# Altium PCB PCB_Mobile-robot.pcbdoc
Units mm, origin at the board's own origin, x right, y up, seen from the top; angles counter-clockwise.
Board outline 125.65 x 110.65 mm, 2 copper layers (Top Layer, Bottom Layer); 24 components, 75 nets, 140 pads, 0 vias.
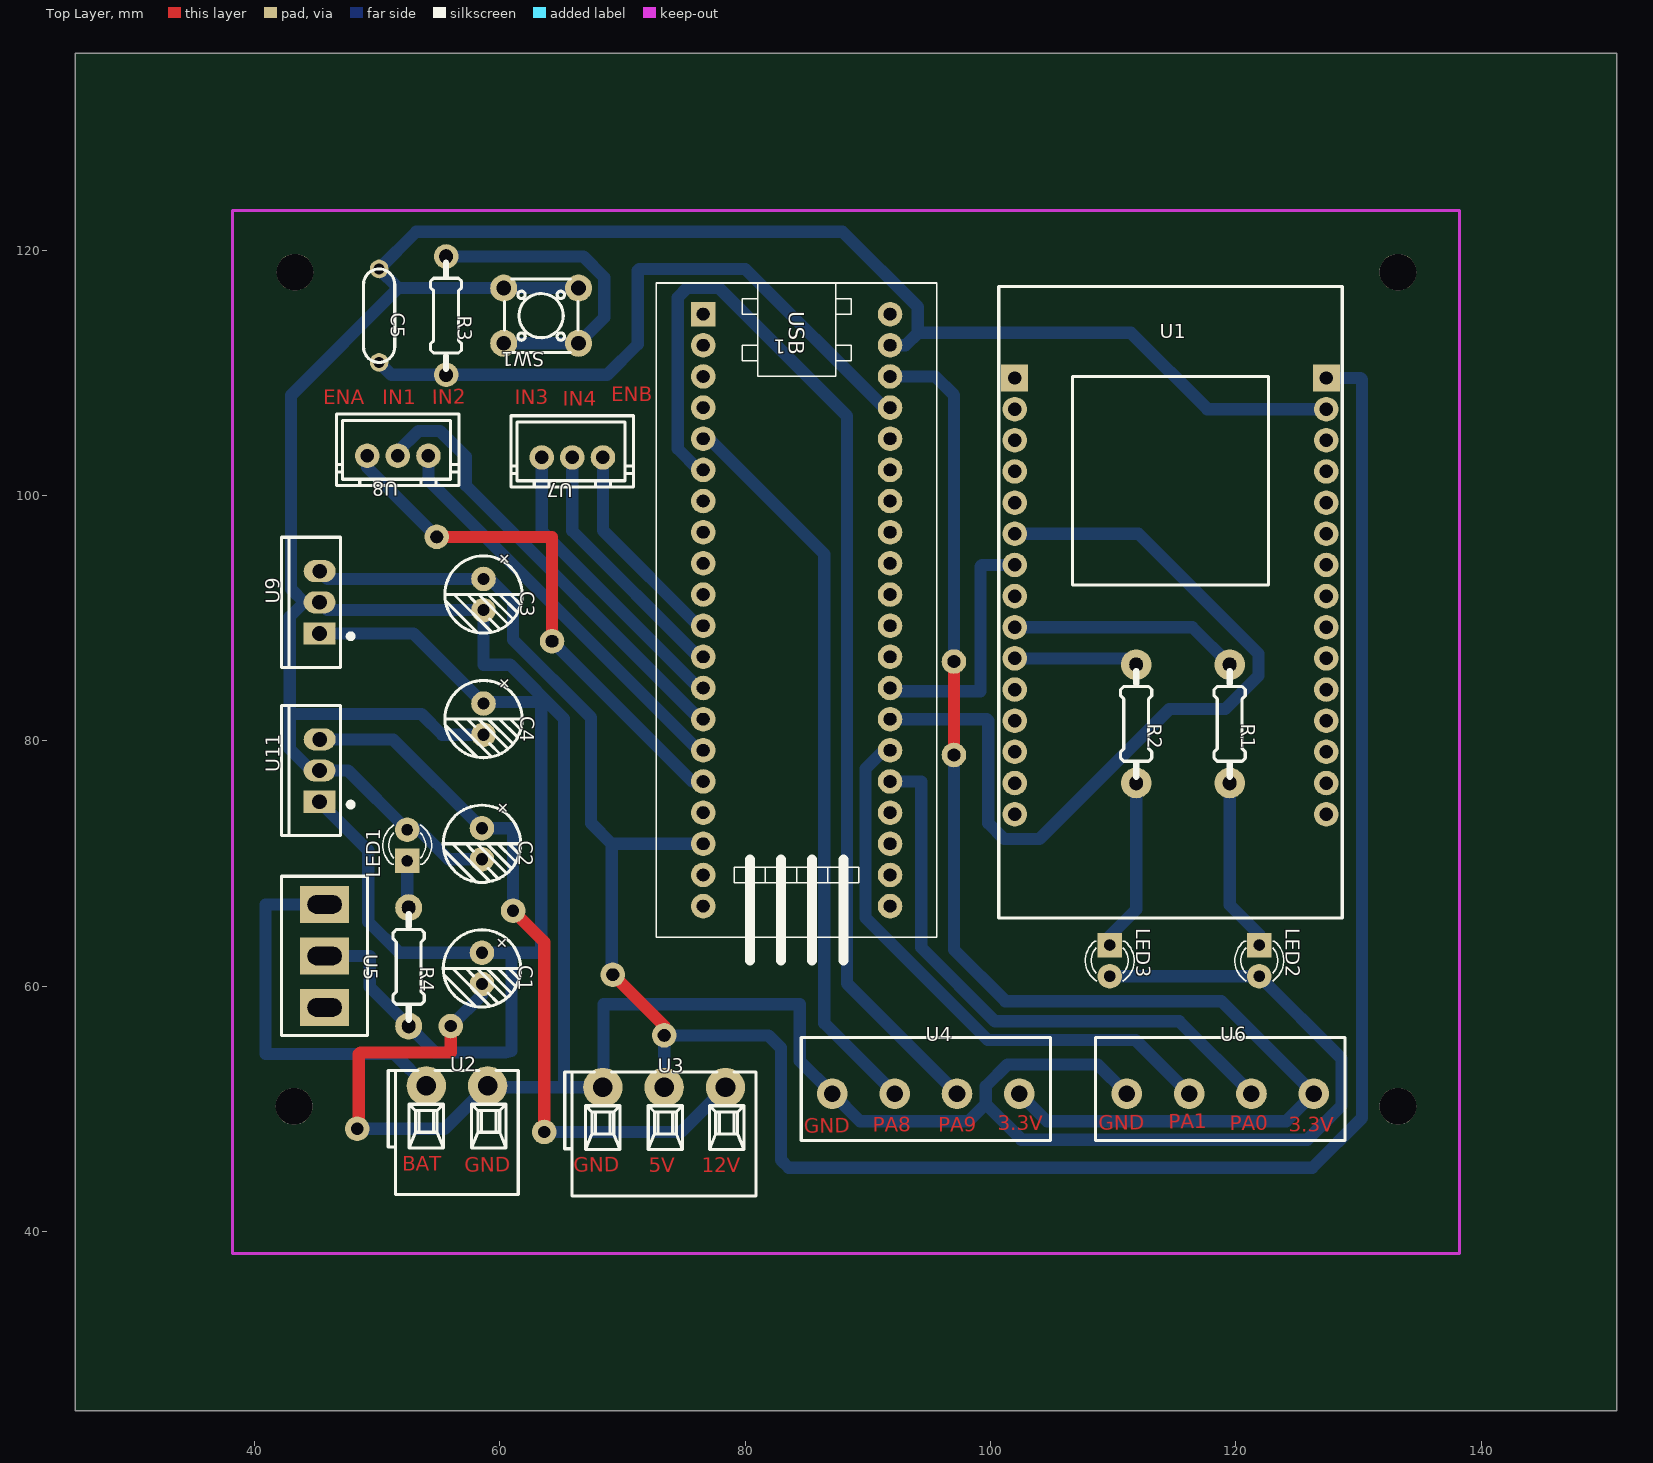
[diagram p0: Top Layer view]
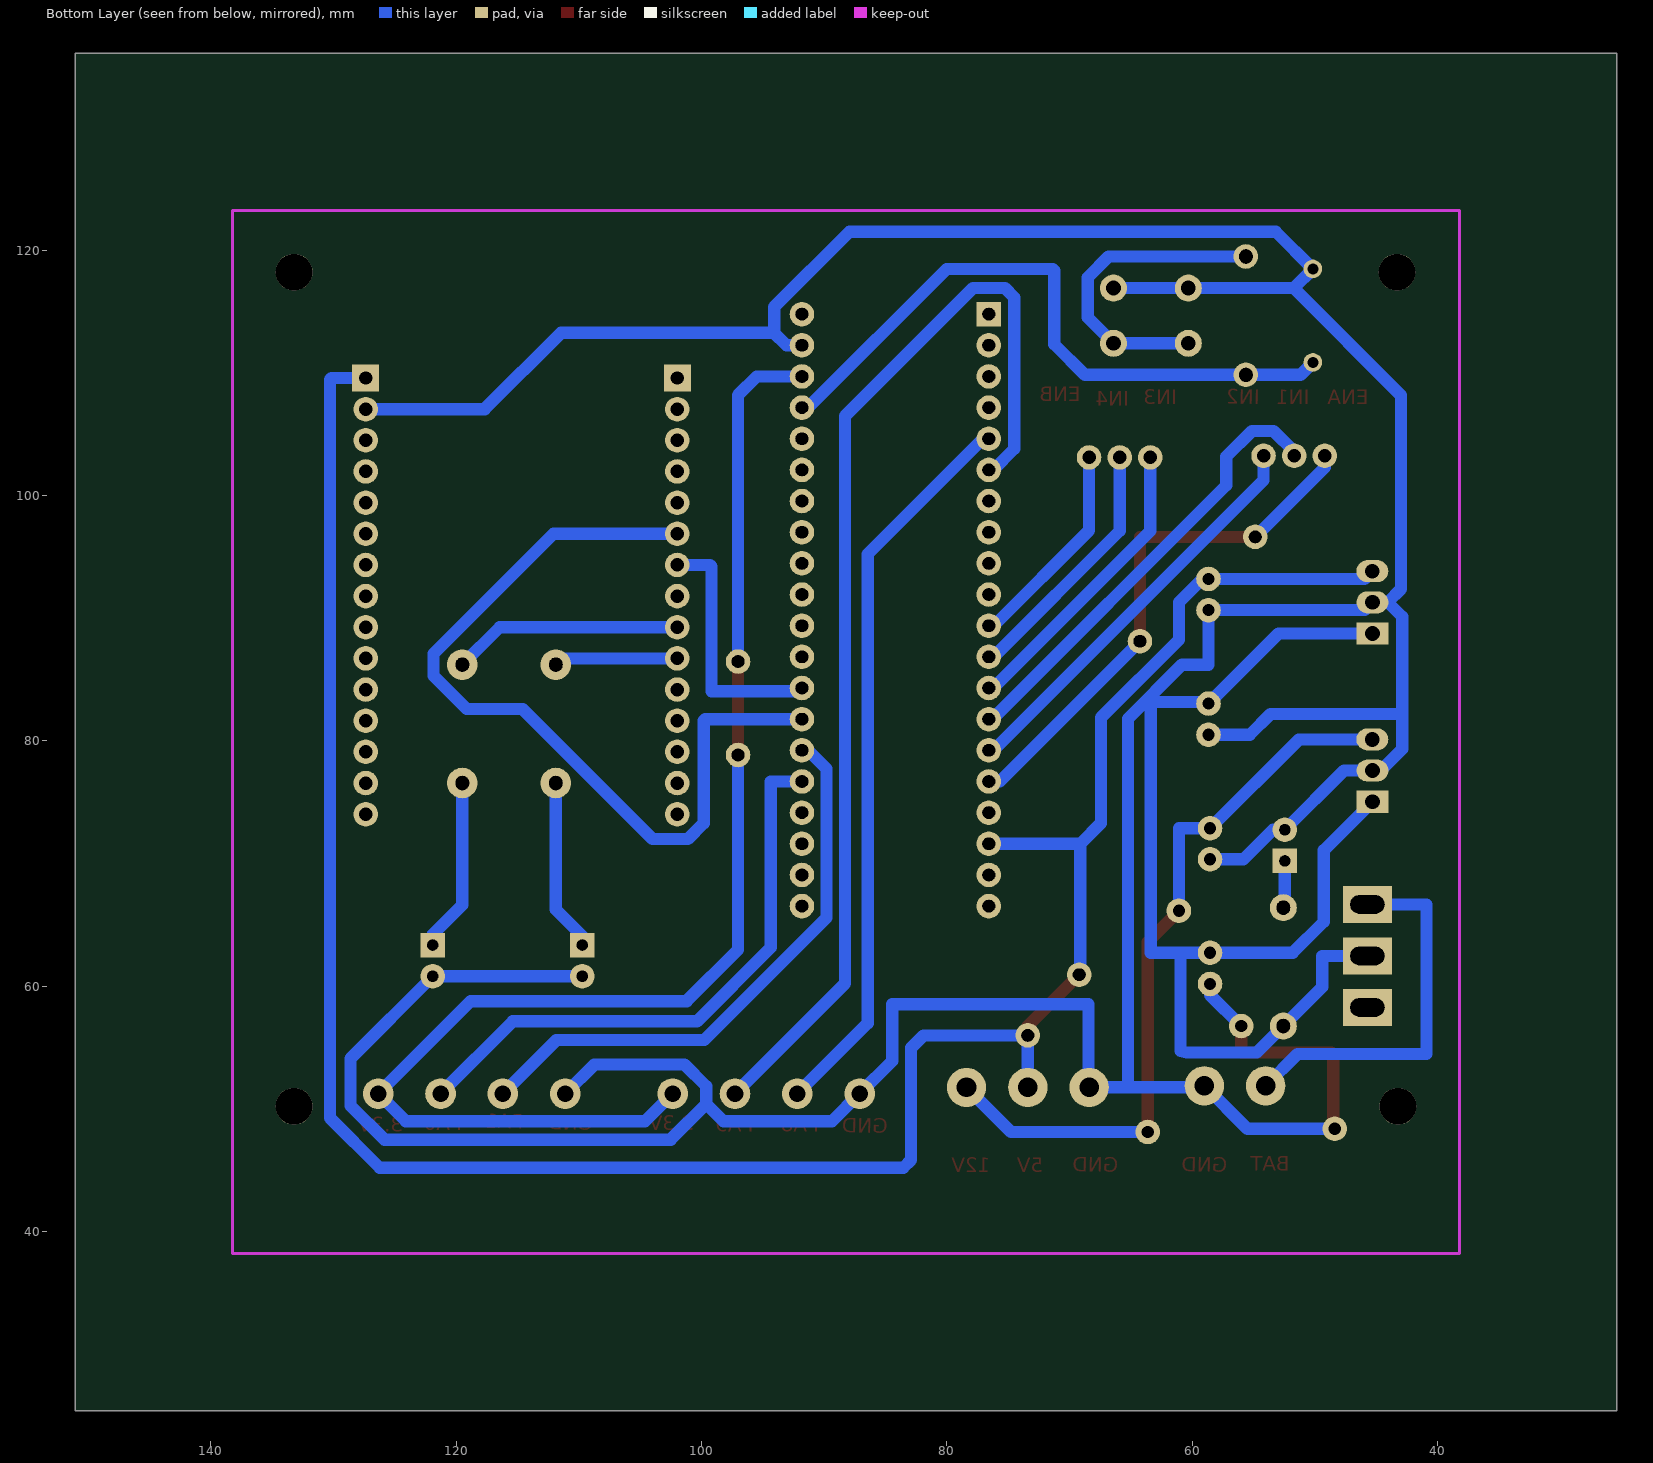
[diagram p1: Bottom Layer view, seen from below]

## Layer stack, top to bottom
Top Layer: signal copper (thickness not stored)
Dielectric: dielectric 0.32, FR-4, Dk 4.8
Bottom Layer: signal copper (thickness not stored)

## Board outline
151.054,25.4 25.4,25.4 25.4,136.054 151.054,136.054

## Components (designator, comment, footprint, x,y, rotation, side; value= is the part's Value field where it differs from the comment)
1 "STM32F103C8T6-MODULE" STM32F103C8T6-MODULE 84.201,91.934 r270 top
C1 "0.33u" CAP-GT-6.3*11 58.547,61.454 r270 top
C2 "0.1u" CAP-GT-6.3*11 58.547,71.614 r270 top
C3 "0.1u" CAP-GT-6.3*11 58.674,91.934 r270 top
C4 "0.33u" CAP-GT-6.3*11 58.674,81.774 r270 top
C5 "104" ? 50.165,114.667 r270 top
LED1 "LED-3MM红" LED_D3.0MM 52.451,71.487 r90 top
LED2 "LED-3MM红" LED_D3.0MM 121.92,62.089 r270 top
LED3 "LED-3MM红" LED_D3.0MM 109.728,62.089 r270 top
R1 "10k" "RESISTOR-1/4W - 2"#1 119.507,81.393 r270 top
R2 "10k" "RESISTOR-1/4W - 2"#1 111.887,81.393 r270 top
R3 "10k" "RESISTOR-1/4W - 2"#2 55.626,114.667 r270 top
R4 "10k" "RESISTOR-1/4W - 2"#3 52.578,61.581 r270 top
SW1 "Button-6x6x6mm" SW-TH_4P-L6.0-W6.0-P4.50-LS6.1 63.373,114.667 r180 top
U1 "ESP32 - DEVKIT" "ESP32 - DEVKIT" 114.681,91.807 r0 top
U2 "KF126R-5.0-2P" CONN-TH_P5.00_KF126R-5.0-2P 56.511,51.882 r0 top
U3 "KF126R-5.0-3P" CONN-TH_3P-P5.00_KF126R-5.0-3P 73.402,51.755 r0 top
U4 "HT5.08_ST_4P" HT5.08_ST_4P 94.992,48.961 r0 top
U5 "Toggle Switch" TOGGLESWITCH2 45.72,62.47 r270 top
U6 "HT5.08_ST_4P" HT5.08_ST_4P 118.995,48.961 r0 top
U7 "XH2.54-3P 直插" CONN-TH_XH2.54-3P 65.912,103.11 r180 top
U8 "XH2.54-3P 直插" CONN-TH_XH2.54-3P 51.688,103.237 r180 top
U9 "L7805" TO-220-3_L10.0-W4.5-P2.54-L 45.314,91.299 r90 top
U11 "L7812" TO-220-3_L10.0-W4.5-P2.54-L 45.314,77.583 r90 top

## Footprints (in the part's own frame and the unit in brackets; to place one, negate y for a bottom-side part, rotate by r counter-clockwise, add the part's x,y. Pads: shape width x height; smd on the part's side, far side on the other; paste and mask are expansions set on the pad)
CAP-GT-6.3*11 [mm]
  round 2 hole 1 paste+0 mask+0.051: 1(-1.27,0) 2(1.27,0)
  silkscreen extent -3.15,-3.15 3.15,3.15
CONN-TH_3P-P5.00_KF126R-5.0-3P [mm]
  round 3.2 hole 1.6 paste+0 mask+0.051: 1(-5,0) 2(0,0) 3(5,0)
  silkscreen extent -8.1,-8.85 7.5,1.25
CONN-TH_P5.00_KF126R-5.0-2P [mm]
  round 3.2 hole 1.6 paste+0 mask+0.051: 1(-2.5,0) 2(2.5,0)
  silkscreen extent -5.6,-8.85 5,1.25
CONN-TH_XH2.54-3P [mm]
  round 2 hole 1.1 paste+0 mask+0.05: 1(-2.5,0) 2(0,0) 3(2.5,0)
  silkscreen extent -5,-3.4 5,2.4
"ESP32 - DEVKIT" [mm]
  rect 2.2x2.2 hole 1.1 paste+0 mask+0.051: 1(12.7,17.78) 30(-12.7,17.78)
  round 2 hole 1.1 paste+0 mask+0.051: 2(12.7,15.24) 3(12.7,12.7) 4(12.7,10.16) 5(12.7,7.62) 6(12.7,5.08) 7(12.7,2.54) 8(12.7,0) 9(12.7,-2.54) 10(12.7,-5.08) 11(12.7,-7.62) 12(12.7,-10.16) 13(12.7,-12.7) 14(12.7,-15.24) 15(12.7,-17.78) 16(-12.7,-17.78) 17(-12.7,-15.24) 18(-12.7,-12.7) 19(-12.7,-10.16) 20(-12.7,-7.62) 21(-12.7,-5.08) 22(-12.7,-2.54) 23(-12.7,0) 24(-12.7,2.54) 25(-12.7,5.08) 26(-12.7,7.62) 27(-12.7,10.16) 28(-12.7,12.7) 29(-12.7,15.24)
  silkscreen extent -14,-26.26 14,25.24
HT5.08_ST_4P [mm]
  round 2.5 hole 1.35 paste+0 mask+0.102: 1(-7.874,2.286) 2(-2.794,2.286) 3(2.286,2.286) 4(7.366,2.286)
  silkscreen extent -10.41,-1.54 9.91,6.86
LED_D3.0MM [mm]
  rect 2x2 hole 0.9 slot 0.905 at 0 deg paste+0 mask+0.102: 1(-1.27,0)
  round 2 hole 0.9 slot 0.905 at 0 deg paste+0 mask+0.102: 2(1.27,0)
  silkscreen extent -1.56,-1.99 1.67,1.99
"RESISTOR-1/4W - 2"#1 [mm]
  round 2.5 hole 1.1 slot 1.155 at 0 deg paste+0 mask+0.051: 1(-4.826,0) 2(4.826,0)
  silkscreen extent -4.32,-1.27 4.32,1.27
"RESISTOR-1/4W - 2"#2 [mm]
  round 2 hole 1.1 slot 1.155 at 0 deg paste+0 mask+0.051: 1(-4.826,0) 2(4.826,0)
  silkscreen extent -4.32,-1.27 4.32,1.27
"RESISTOR-1/4W - 2"#3 [mm]
  round 2.2 hole 1.1 slot 1.155 at 0 deg paste+0 mask+0.051: 1(-4.826,0) 2(4.826,0)
  silkscreen extent -4.32,-1.27 4.32,1.27
STM32F103C8T6-MODULE [mm]
  round 2 hole 1 slot 1.05 at 90 deg paste+0 mask+0.051: 3.3V_1(25.4,-7.62) 3.3V_2(-17.78,7.62) 5V(20.32,-7.62) GND_1(22.86,-7.62) GND_2(-20.32,7.62) GND_3(-22.86,7.62) PA_0(15.24,7.62) PA_1(12.7,7.62) PA_2(10.16,7.62) PA_3(7.62,7.62) PA_4(5.08,7.62) PA_5(2.54,7.62) PA_6(0,7.62) PA_7(-2.54,7.62) PA_8(-12.7,-7.62) PA_9(-10.16,-7.62) PA_10(-7.62,-7.62) PA_11(-5.08,-7.62) PA_12(-2.54,-7.62) PA_15(0,-7.62) PB_0(-5.08,7.62) PB_1(-7.62,7.62) PB_3(2.54,-7.62) PB_4(5.08,-7.62) PB_5(7.62,-7.62) PB_6(10.16,-7.62) PB_7(12.7,-7.62) PB_8(15.24,-7.62) PB_9(17.78,-7.62) PB_10(-10.16,7.62) PB_11(-12.7,7.62) PB_13(-20.32,-7.62) PB_14(-17.78,-7.62) PB_15(-15.24,-7.62) PC_13(22.86,7.62) PC_14(20.32,7.62) PC_15(17.78,7.62) RESET(-15.24,7.62) VB(25.4,7.62)
  rect 2x2 hole 1 slot 1.05 at 90 deg paste+0 mask+0.051: PB_12(-22.86,-7.62)
  silkscreen extent -25.4,-11.43 29.84,11.43
SW-TH_4P-L6.0-W6.0-P4.50-LS6.1 [mm]
  round 2.2 hole 1.2 paste+0 mask+0.051: 1(-3.05,2.25) 2(3.05,2.25) 3(-3.05,-2.25) 4(3.05,-2.25)
  silkscreen extent -3,-3 3,3
TO-220-3_L10.0-W4.5-P2.54-L [mm]
  rect 1.8x2.6 hole 1.2 paste+0 mask+0.051: 1(-2.54,0.005)
  oval 1.8x2.6 hole 1.2 paste+0 mask+0.051: 2(0,0.005) 3(2.54,-0.005)
  silkscreen extent -5.3,-2.73 5.3,3.09
TOGGLESWITCH2 [mm]
  rect 3x4 hole 1.5 slot 2.8 at 90 deg paste+0 mask+0.102: 1(-4.2,0) 2(0,0) 3(4.2,0)
  silkscreen extent -6.5,-3.5 6.5,3.5
? [mil]
  round 60 hole 36 paste+0 mask+2: 1(-150,0) 2(150,0)
  silkscreen extent -150,-50 150,50

## Free pads (board coordinates)
  round 2 hole 1 paste+0 mask+0.051: 1(61.087,66.153) 1(63.627,48.119) 2(48.387,48.373) 2(56.007,56.755)
  round 2 hole 1 slot 1.05 at 0 deg paste+0 mask+0.051: 3.3V_2(97.028,78.853) 3.3V_2(97.028,86.473) 5V(69.215,60.946) 5V(73.406,55.993) PB_8(54.864,96.633) PB_8(64.262,88.124)
  round 3 hole 3 unplated paste+0: ""(43.227,50.213) ""(43.307,118.213) ""(133.227,50.213) ""(133.227,118.213)

## Nets (pads, with @x,y where several pads share a name; then routed paths per layer and width w, separated by ;. In a path a pad name is that pad's centre, name@x,y a point inside that pad or via, vN(x,y) a via of type N, cw(c..) or ccw(c..) an arc to the next point about the centre after c; other vN are vias at no path point)
1_3.3V_1: 1.3.3V_1
1_GND_1: 1.GND_1
1_GND_3: 1.GND_3
1_PA_4: 1.PA_4
1_PA_5: 1.PA_5
1_PA_6: 1.PA_6
1_PA_7: 1.PA_7
1_PA_10: 1.PA_10
1_PA_11: 1.PA_11
1_PA_12: 1.PA_12
1_PA_15: 1.PA_15
1_PB_0: 1.PB_0
1_PB_1: 1.PB_1
1_PB_9: 1.PB_9
1_PB_10: 1.PB_10
1_PB_11: 1.PB_11
1_PB_12: 1.PB_12
1_PB_13: 1.PB_13
1_PB_14: 1.PB_14
1_PB_15: 1.PB_15
1_PC_13: 1.PC_13
1_PC_14: 1.PC_14
1_PC_15: 1.PC_15
1_RESET: 1.RESET C5.2 R3.2 | length 53.9
  Bottom Layer w1: C5.2 51.181,109.841 R3.2 68.745,109.841 71.247,112.343 71.247,118.35 71.379,118.482 80.013,118.482 91.321,107.174 1.RESET
1_VB: 1.VB
3.3V: 1.3.3V_2 pad.3.3V_2 U4.4 U6.4 | length 111.1
  Top Layer w1: pad.3.3V_2@97.028,78.853 pad.3.3V_2@97.028,86.473
  Bottom Layer w1: 1.3.3V_2 95.504,109.714 97.028,108.19 pad.3.3V_2@97.028,86.473 ; pad.3.3V_2@97.028,78.853 97.028,62.978 101.219,58.787 118.821,58.787 U6.4 124.109,48.995 118.51,48.995 104.61,48.995 U4.4
5V: 1.5V C3.1 pad.5V U1.1 U3.2 U9.3 | length 200.5
  Top Layer w1: pad.5V@69.215,60.946 73.406,56.755 pad.5V@73.406,55.993
  Bottom Layer w1: U9.3@45.319,93.839 45.954,93.204 C3.1 59.182,93.204 61.087,91.299 61.087,88.251 67.437,81.901 67.437,73.298 69.121,71.614 ; pad.5V@69.215,60.946 69.121,61.04 69.121,71.614 ; U3.2 73.406,55.993 81.915,55.993 82.931,54.977 82.931,45.833 83.566,45.198 126.238,45.198 130.302,49.262 130.302,109.46 130.175,109.587 U1.1 ; 1.5V 69.121,71.614
12V: C2.1 pad.1 U3.3 U11.3 | length 60.9
  Top Layer w1: pad.1@61.087,66.153 63.627,63.613 pad.1@63.627,48.119
  Bottom Layer w1: U11.3 51.308,80.123 C2.1 61.087,72.884 pad.1@61.087,66.153 ; pad.1@63.627,48.119 74.766,48.119 U3.3
C1_1: C1.1 C4.1 R4.2 U5.2 U9.1 U11.1 | length 95.5
  Bottom Layer w1: U11.1 49.276,71.076 49.276,65.264 51.816,62.724 C1.1 60.96,62.724 ; U9.1 52.959,88.759 58.674,83.044 58.801,83.171 63.373,83.171 63.373,62.724 60.96,62.724 ; U5.2@45.72,62.47 49.403,62.47 49.403,59.93 R4.2 54.737,54.596 60.452,54.596 60.96,54.723 60.96,62.724
ENA: 1.PB_8 pad.PB_8 U8.3 | length 43.9
  Top Layer w1: pad.PB_8@54.864,96.633 64.262,96.633 pad.PB_8@64.262,88.124
  Bottom Layer w1: U8.3 49.188,102.309 pad.PB_8@54.864,96.633 ; pad.PB_8@64.262,88.124 75.692,76.694 1.PB_8
ENB: 1.PB_3 U7.1 | length 17.3
  Bottom Layer w1: U7.1 68.412,97.163 76.181,89.394 1.PB_3
GND: 1.GND_2 C1.2 C2.2 C3.2 C4.2 C5.1 LED1.2 LED2.2 LED3.2 pad.2 SW1.3 SW1.4 U1.2 U2.2 U3.1 U4.1 U6.1 U9.2 U11.2 | length 399.7
  Top Layer w1: pad.2@48.387,48.373 48.514,48.5 48.514,54.469 48.641,54.596 56.007,54.596 pad.2@56.007,56.755
  Bottom Layer w1: pad.2@48.387,48.373 55.502,48.373 U2.2 59.138,51.755 U3.1 ; pad.2@56.007,56.755 58.547,59.295 C1.2 ; C2.2 55.836,70.344 53.423,72.757 LED1.2 47.625,77.583 U11.2 44.635,77.583 42.881,79.337 42.881,82.192 ; C4.2@58.674,80.504 55.316,80.504 53.628,82.192 42.881,82.192 ; 65.237,51.754 65.237,81.815 60.833,86.219 58.674,86.219 C3.2 45.944,90.664 U9.2 U9.2@44.061,91.299 ; SW1.3 SW1.4 51.725,116.917 ; U3.1 68.453,51.805 68.453,58.533 84.455,58.533 84.455,53.91 U4.1 ; U4.1 89.37,48.995 98.216,48.995 99.618,50.397 ; 1.GND_2 93.072,112.254 94.085,113.267 ; LED3.2 LED2.2 128.627,54.112 128.627,50.26 125.859,47.493 102.521,47.493 99.618,50.397 ; U6.1 108.74,53.628 101.392,53.628 99.618,51.854 99.618,50.397 ; U1.2 117.688,107.047 111.468,113.267 94.085,113.267 ; 42.881,82.192 42.881,90.118 U9.2@44.061,91.299 ; U9.2@44.061,91.299 42.981,92.379 42.981,108.173 51.725,116.917 ; 51.725,116.917 C5.1 53.191,121.503 87.95,121.503 94.085,115.368 94.085,113.267
IN1: 1.PB_6 U8.2 | length 37
  Bottom Layer w1: U8.2 51.688,103.586 53.374,105.271 55.132,105.271 57.224,103.179 57.224,100.84 76.29,81.774 1.PB_6
IN2: 1.PB_7 U8.1 | length 33.5
  Bottom Layer w1: U8.1 54.188,101.246 76.201,79.234 1.PB_7
IN3: 1.PB_5 U7.3 | length 24.5
  Bottom Layer w1: U7.3 63.412,97.129 76.227,84.314 1.PB_5
IN4: 1.PB_4 U7.2 | length 20.9
  Bottom Layer w1: U7.2 65.912,97.138 76.196,86.854 1.PB_4
PA0: 1.PA_0 U6.3 | length 47.9
  Bottom Layer w1: 1.PA_0 94.361,76.694 94.361,63.151 100.375,57.136 115.392,57.136 U6.3
PA1: 1.PA_1 U6.2 | length 47.1
  Bottom Layer w1: 1.PA_1 91.319,79.234 89.811,77.726 89.811,65.577 99.778,55.609 111.839,55.609 U6.2
PA8: 1.PA_8 U4.2 | length 60.1
  Bottom Layer w1: 1.PA_8 77.046,104.634 86.452,95.228 86.452,56.994 U4.2
PA9: 1.PA_9 U4.3 | length 92.5
  Bottom Layer w1: 1.PA_9 76.229,102.094 74.504,103.819 74.504,116.158 75.261,116.916 77.876,116.916 88.3,106.492 88.3,60.225 U4.3
R1_2: LED2.1 R1.2 | length 14.2
  Bottom Layer w1: R1.2 119.507,66.63 121.92,64.217 LED2.1
R2_2: LED3.1 R2.2 | length 14.1
  Bottom Layer w1: LED3.1 109.728,64.09 109.855,64.217 111.887,66.249 R2.2
R3_1: R3.1 SW1.1 SW1.2 | length 25.9
  Bottom Layer w1: R3.1 66.82,119.493 68.525,117.787 68.525,114.519 SW1.1 SW1.2
R4_1: LED1.1 R4.1 | length 3.9
  Bottom Layer w1: LED1.1 52.451,66.534 R4.1
RX: 1.PA_3 U1.24 | length 20.5
  Bottom Layer w1: 1.PA_3 92.075,84.06 99.187,84.06 99.187,94.22 99.314,94.347 U1.24
S$10: 
TX: 1.PA_2 U1.25 | length 70.2
  Bottom Layer w1: 1.PA_2 99.695,81.774 99.825,81.65 99.825,73.298 101.117,72.005 104,72.005 114.59,82.594 119.139,82.594 121.851,85.307 121.851,87.103 112.067,96.887 U1.25
U1_3: U1.3
U1_4: U1.4
U1_5: U1.5
U1_6: U1.6
U1_7: U1.7
U1_8: U1.8
U1_9: U1.9
U1_10: U1.10
U1_11: U1.11
U1_12: U1.12
U1_13: U1.13
U1_14: U1.14
U1_15: U1.15
U1_16: U1.16
U1_17: U1.17
U1_18: U1.18
U1_19: U1.19
U1_20: U1.20
U1_21: R2.1 U1.21 | length 10.1
  Bottom Layer w1: U1.21 111.379,86.727 R2.1
U1_22: R1.1 U1.22 | length 18.8
  Bottom Layer w1: U1.22 116.459,89.267 R1.1
U1_23: U1.23
U1_26: U1.26
U1_27: U1.27
U1_28: U1.28
U1_29: U1.29
U1_30: U1.30
U2_1: U2.1 U5.1 | length 31.2
  Bottom Layer w1: U5.1 40.902,66.669 40.894,54.469 51.425,54.469 U2.1
U5_3: U5.3

## Polygon pours and split planes (outlines as drawn)
GND on Bottom Layer (solid): 38.227,123.176 138.176,123.176 138.176,38.213 38.354,38.213 38.227,38.34 38.227,123.176

## Other copper
Top Layer:
  text "ENB" at 69.088,107.301 h2.03
  text "ENA" at 45.593,107.047 h2.03
  text "IN1" at 50.419,107.047 h2.03
  text "IN2" at 54.483,107.047 h2.03 r1
  text "IN3" at 61.214,107.047 h2.03
  text "IN4" at 65.151,106.92 h2.03
  text "PA1" at 114.554,47.992 h2.03 r1
  text "3.3V" at 100.584,47.865 h2.03
  text "GND" at 108.839,47.865 h2.03 r1
  text "PA0" at 119.507,47.865 h2.03
  text "PA8" at 90.424,47.738 h2.03
  text "PA9" at 95.758,47.738 h2.03
  text "3.3V" at 124.333,47.738 h2.03
  text "GND" at 84.836,47.611 h2.03 r1
  text "BAT" at 52.07,44.563 h2.03
  text "GND" at 57.15,44.436 h2.03 r1
  text "GND" at 66.04,44.436 h2.03 r1
  text "5V" at 72.136,44.436 h2.03
  text "12V" at 76.454,44.436 h2.03

## Text inside footprints (layer, text, board x,y; h text height)
1: Top Overlay "USB" at 83.566,115.048 h1.27 r270
C1: Top Overlay "+" at 59.463,63.641 h1 r315
C2: Top Overlay "+" at 60.171,73.801 h1 r45
C3: Top Overlay "+" at 60.298,94.121 h1 r45
C4: Top Overlay "+" at 60.298,83.961 h1 r45